# EAGLE board pro_mini_saber (EAGLE 6.4)

Size 100 x 80 mm. Coordinates in mm from the lower left corner, seen from the top.
Outline: 0,0 100,0 100,80 0,80 0,0
Copper layers (1*16): Top 0.035mm / dielectric 1.5mm / Bottom 0.035mm
Design rules "default": minimum track width 10mil, minimum drill 24mil, track to track 8mil, track to pad 8mil, pad to pad 8mil, via to via 8mil, smd to smd 8mil, copper to edge 40mil, drill to drill 8mil, minimum pad ring 10mil, minimum via ring 8mil, stop-mask expansion 4mil, vias tented up to drill 0mil, thermal gap 10mil
Net classes: 1 power: width 0.508 mm

## Footprints (pad centres in the part's own frame; a part is rotated, then mirrored left to right if it is on the bottom)
1X02 = drill 1.016 pad 1.88: 1 0,0; 2 2.54,0
SML0805 = smd 1.2 x 1.2: A 1.05,0; C -1.05,0
1X04 = drill 1.016 pad 1.88 square: 1 0,0 | drill 1.016 pad 1.88: 2 2.54,0; 3 5.08,0; 4 7.62,0
1X02' = drill 1.016 long: 1 -1.27,0; 2 1.27,0
C0805 = smd 1.3 x 1.5: 1 -0.85,0; 2 0.85,0
C1206K = smd 1.5 x 2: 1 -1.5,0; 2 1.5,0
C025-025X050 = drill 0.813 octagon: 1 -1.27,0; 2 1.27,0
TQFP32-08 = smd 1.27 x 0.559: 1 -4.293,2.8; 2 -4.293,2; 3 -4.293,1.2; 4 -4.293,0.4; 5 -4.293,-0.4; 6 -4.293,-1.2; 7 -4.293,-2; 8 -4.293,-2.8; 17 4.293,-2.8; 18 4.293,-2; 19 4.293,-1.2; 20 4.293,-0.4; 21 4.293,0.4; 22 4.293,1.2; 23 4.293,2; 24 4.293,2.8 | smd 0.559 x 1.27: 9 -2.8,-4.293; 10 -2,-4.293; 11 -1.2,-4.293; 12 -0.4,-4.293; 13 0.4,-4.293; 14 1.2,-4.293; 15 2,-4.293; 16 2.8,-4.293; 25 2.8,4.293; 26 2,4.293; 27 1.2,4.293; 28 0.4,4.293; 29 -0.4,4.293; 30 -1.2,4.293; 31 -2,4.293; 32 -2.8,4.293
DIL08 = drill 0.813 long: 1 -3.81,-3.81; 2 -1.27,-3.81; 3 1.27,-3.81; 4 3.81,-3.81; 5 3.81,3.81; 6 1.27,3.81; 7 -1.27,3.81; 8 -3.81,3.81
1X03 = drill 1.016 pad 1.88: 1 0,0; 2 2.54,0; 3 5.08,0
MMA8451 = drill 0.8: 3.3V -7.62,6.35; GND -7.62,3.81; INT1 -7.62,-8.89; INT2 -7.62,-6.35; SA0 -7.62,-3.81; SCL -7.62,1.27; SDA -7.62,-1.27; VCC_IN -7.62,8.89
1X11 = drill 1.016 pad 1.88: 1 0,0; 2 2.54,0; 3 5.08,0; 4 7.62,0; 5 10.16,0; 6 12.7,0; 7 15.24,0; 8 17.78,0; 9 20.32,0; 10 22.86,0; 11 25.4,0
MA03-2 = drill 1.016: 1 -2.54,-1.27 | drill 1.016 octagon: 2 -2.54,1.27; 3 0,-1.27; 4 0,1.27; 5 2.54,-1.27; 6 2.54,1.27
QS = drill 0.61 long: 1 -2.54,0; 2 2.54,0
R0805 = smd 1.3 x 1.5: 1 -0.95,0; 2 0.95,0
M0805 = smd 1.3 x 1.6: 1 -0.95,0; 2 0.95,0
TSSOP20 = smd 0.305 x 0.991: 1 -2.925,-2.918; 2 -2.275,-2.918; 3 -1.625,-2.918; 4 -0.975,-2.918; 5 -0.325,-2.918; 6 0.325,-2.918; 7 0.975,-2.918; 8 1.625,-2.918; 9 2.275,-2.918; 10 2.925,-2.918; 11 2.925,2.918; 12 2.275,2.918; 13 1.625,2.918; 14 0.975,2.918; 15 0.325,2.918; 16 -0.325,2.918; 17 -0.975,2.918; 18 -1.625,2.918; 19 -2.275,2.918; 20 -2.925,2.918
SOT23-5 = smd 0.55 x 1.2: 1 -0.95,-1.3; 2 0,-1.3; 3 0.95,-1.3; 4 0.95,1.3; 5 -0.95,1.3
USD-SOCKET-PP = smd 0.75 x 1.5: 1 3.2,16.8; 2 2.1,16.8; 3 1,16.8; 4 -0.1,16.8; 5 -1.2,16.8; 6 -2.3,16.8; 7 -3.4,16.8; 8 -4.5,16.8 | smd 1 x 1.3: CD1 -5.85,16.75 | smd 1.4 x 1: CD2 -6.425,4.5 | smd 1.5 x 1.35: GND1 -6.275,1.475; GND2 7.375,0.475
TPA0211 = smd 1.55 x 0.35: BYPASS -2.1,-1.15; GND 2.1,0.15; IN -2.1,0.8; SE 2.1,-0.5; SHUTDOWN -2.1,0.15; VDD -2.1,-0.5; VO+ 2.1,-1.15; VO- 2.1,0.8
ARDUINO_PRO_MINI = drill 1.016 pad 1.88: 1 -7.62,12.7; 2 -7.62,10.16; 3 -7.62,7.62; 4 -7.62,5.08; 5 -7.62,2.54; 6 -7.62,0; 7 -7.62,-2.54; 8 -7.62,-5.08; 9 -7.62,-7.62; 10 -7.62,-10.16; 11 -7.62,-12.7; 12 -7.62,-15.24; 13 7.62,-15.24; 14 7.62,-12.7; 15 7.62,-10.16; 16 7.62,-7.62; 17 7.62,-5.08; 18 7.62,-2.54; 19 7.62,0; 20 7.62,2.54; 21 7.62,5.08; 22 7.62,7.62; 23 7.62,10.16; 24 7.62,12.7; A4 4.763,1.429; A5 4.763,3.969; A6 4.763,-9.049; A7 4.763,-6.509; BLK -6.35,15.24; GND -3.81,15.24; GRN 6.35,15.24; RXI 1.27,15.24; TXO 3.81,15.24; VCC -1.27,15.24
PTH08080EUF = drill 1.2 octagon: 1 0,0; 2 0,-3.556; 3 0,-7.112; 4 12.192,-8.382; 5 12.192,1.27

## Placement (x,y rotation side)
3.3V_OUT  M02PTH  [1X02]  -21.59,64.77 0 top  (outside the outline)
3V3  [SML0805]  -36.83,82.55 0 top  (outside the outline)
5V_OUT  M02PTH  [1X02]  -30.48,64.77 0 top  (outside the outline)
ADC  [1X04]  -50.8,77.47 0 top  (outside the outline)
ADC1  [1X04]  -62.23,77.47 0 top  (outside the outline)
ATMEGA  [SML0805]  -31.75,82.55 0 top  (outside the outline)
BAT_IN  [1X02']  -48.26,71.12 0 top  (outside the outline)
BLUETOOTH  [1X04]  -39.37,77.47 0 top  (outside the outline)
C1  22p  [C0805]  -71.12,71.12 0 top  (outside the outline)
C2  22p  [C0805]  -16.51,78.74 0 top  (outside the outline)
C3  0.1u  [C0805]  -60.96,71.12 0 top  (outside the outline)
C4  22p  [C0805]  -21.59,78.74 0 top  (outside the outline)
C5  [C1206K]  -41.91,83.82 0 top  (outside the outline)
C6  0.1u  [C0805]  -66.04,71.12 0 top  (outside the outline)
C7  [C025-025X050]  -71.12,77.47 0 top  (outside the outline)
C8  [C1206K]  -46.99,83.82 0 top  (outside the outline)
C9  22p  [C0805]  -26.67,78.74 0 top  (outside the outline)
HP  [1X02']  -54.61,71.12 0 top  (outside the outline)
IC2  MEGA8-AI  [TQFP32-08]  -68.58,40.64 0 top  (outside the outline)
IC6  MCP4921  [DIL08]  -55.88,40.64 0 top  (outside the outline)
LED  SMALL_SERVO  [1X03]  -66.04,54.61 0 top  (outside the outline)
MMA8451  DEV  [MMA8451]  -59.69,11.43 0 top  (outside the outline)
MPU-9150  Accelerometer  [1X11]  -50.8,54.61 0 top  (outside the outline)
PROG  [MA03-2]  -19.05,55.88 0 top  (outside the outline)
Q1  [QS]  -48.26,63.5 0 top  (outside the outline)
R1  10k  [R0805]  -26.67,72.39 0 top  (outside the outline)
R2  100k  [R0805]  -58.42,64.77 0 top  (outside the outline)
R3  100k  [R0805]  -64.77,64.77 0 top  (outside the outline)
R4  350  [R0805]  -21.59,72.39 0 top  (outside the outline)
R5  10k  [R0805]  -31.75,72.39 0 top  (outside the outline)
R6  100k  [R0805]  -71.12,64.77 0 top  (outside the outline)
R7  1k  [M0805]  -36.83,72.39 0 top  (outside the outline)
R8  1k  [M0805]  -41.91,72.39 0 top  (outside the outline)
R9  1.5k  [R0805]  -16.51,72.39 0 top  (outside the outline)
R11  [R0805]  -16.51,82.55 0 top  (outside the outline)
R12  [R0805]  -22.86,82.55 0 top  (outside the outline)
U1  [TSSOP20]  -36.83,64.77 0 top  (outside the outline)
U2  [SOT23-5]  -66.04,77.47 0 top  (outside the outline)
U3  USD-SOCKETUSD  [USD-SOCKET-PP]  -45.72,6.35 0 top  (outside the outline)
U$1  TPA0211  [TPA0211]  -26.67,38.1 0 top  (outside the outline)
U$2  ARDUINO_PRO_MINI  [ARDUINO_PRO_MINI]  -27.94,17.78 0 top  (outside the outline)
U$4  PTH08080  [PTH08080EUF]  -48.26,44.45 0 top  (outside the outline)

## Library data of the parts
3.3V_OUT 5V_OUT ADC ADC1 BLUETOOTH MPU-9150 U3 = SparkFun-Connectors
3V3 ATMEGA = led
BAT_IN HP = pinhead
C1-C4 C6 C9 IC6 U1 = adafruit
C5 C7 C8 R1-R9 R11 R12 = rcl
IC2 = atmel
LED = SparkFun-Electromechanical
MMA8451 = MMA8451_miniboard
PROG = con-lstb
Q1 = special
U2 = SparkFun-PowerIC; PROD_ID: VREG-00822
U$1 = TPA0211
U$2 = SparkFun-Boards
U$4 = PTH08080

## Nets
+3V3: 3.3V_OUT.1 BLUETOOTH.4 C1.2 MPU-9150.2 R7.2 U1.2 U2.5 U3.4
+5V: 5V_OUT.1 C2.2 C5.1 IC2.4 IC2.6 IC6.1 LED.2 MMA8451.VCC_IN PROG.2 R1.2 R5.1 R6.1 U1.19 U2.1 U2.3 U$1.VDD U$2.21 U$4.3
+12V: BAT_IN.1 C8.1 R2.2 U$2.24 U$4.1
ADC0: ADC.1 IC2.23
ADC1: ADC.2 IC2.24
ADC2: ADC.3 IC2.25
ADC3: ADC.4 IC2.26
AVCC: IC2.18
BATTLEVEL: IC2.22 R2.1 R3.2 U$2.A6
DAC_CS: IC2.2 IC6.2 U$2.7
DAC_DI: IC2.10 IC6.4 U$2.9
DAC_LATCH: IC2.11 IC6.5 U$2.10
DAC_SCK: IC2.9 IC6.3 U$2.8
GND: 3.3V_OUT.2 3V3.C 5V_OUT.2 ATMEGA.C BAT_IN.2 BLUETOOTH.3 C1.1 C2.1 C3.2 C4.2 C5.2 C6.2 C7.2 C8.2 C9.2 IC2.3 IC2.5 IC2.21 IC6.7 LED.3 MMA8451.GND MPU-9150.1 PROG.6 R3.1 R4.1 R11.1 R12.1 U1.11 U2.2 U3.6 U3.CD1 U3.CD2 U3.GND1 U3.GND2 U$1.GND U$2.4 U$2.23 U$4.2 U$4.5
INT0: IC2.32 MPU-9150.11 U$2.5
INT1: IC2.1 MMA8451.INT1 U$2.6
MISO: IC2.16 PROG.1 U1.20 U$2.15
MMC_CS: IC2.14 R5.2 U1.16 U$2.13
MOSI: IC2.15 U1.18 U$2.14
N$1: C9.1 IC2.8 Q1.2
N$2: C4.1 IC2.7 Q1.1
N$3: R9.1 U$1.IN
N$4: IC6.8 R9.2
N$5: R4.2 U$4.4
N$6: U1.4 U3.5
N$7: U1.1 U3.7
N$8: C3.1 IC2.20
N$9: U1.5 U3.2
N$10: 3V3.A R7.1
N$11: U1.3 U3.3
N$12: ATMEGA.A R8.1
N$13: ADC1.1 U$2.20
N$14: ADC1.2 U$2.19
N$15: ADC1.3 U$2.18
N$16: ADC1.4 U$2.17
N$19: C6.1 IC6.6 R6.2
N$20: IC2.13 LED.1
N$22: HP.1 U$1.VO-
N$23: C7.1 U$1.BYPASS
N$32: R11.2 U$1.SHUTDOWN
N$33: R12.2 U$1.SE
RST: IC2.29 PROG.5 R1.1
RXI: BLUETOOTH.2 IC2.30 U$2.2
SCK: IC2.17 PROG.3 U1.17 U$2.16
SCL: IC2.28 MMA8451.SCL MPU-9150.4 U$2.A5
SDA: IC2.27 MMA8451.SDA MPU-9150.3 U$2.A4
TXO: BLUETOOTH.1 IC2.31 U$2.1
VCC2: R8.2
VO+: HP.2 U$1.VO+

## Tracks (layer width: path | path; a pad name or v marks a point on that pad's centre or on a via)
+3V3  (7 unrouted)
+5V  (17 unrouted)
+12V  (4 unrouted)
ADC0  (1 unrouted)
ADC1  (1 unrouted)
ADC2  (1 unrouted)
ADC3  (1 unrouted)
BATTLEVEL  (3 unrouted)
DAC_CS  (2 unrouted)
DAC_DI  (2 unrouted)
DAC_LATCH  (2 unrouted)
DAC_SCK  (2 unrouted)
GND  (38 unrouted)
INT0  (2 unrouted)
INT1  (2 unrouted)
MISO  (3 unrouted)
MMC_CS  (3 unrouted)
MOSI  (2 unrouted)
N$1  (2 unrouted)
N$2  (2 unrouted)
N$3  (1 unrouted)
N$4  (1 unrouted)
N$5  (1 unrouted)
N$6  (1 unrouted)
N$7  (1 unrouted)
N$8  (1 unrouted)
N$9  (1 unrouted)
N$10  (1 unrouted)
N$11  (1 unrouted)
N$12  (1 unrouted)
N$13  (1 unrouted)
N$14  (1 unrouted)
N$15  (1 unrouted)
N$16  (1 unrouted)
N$19  (2 unrouted)
N$20  (1 unrouted)
N$22  (1 unrouted)
N$23  (1 unrouted)
N$32  (1 unrouted)
N$33  (1 unrouted)
RST  (2 unrouted)
RXI  (2 unrouted)
SCK  (3 unrouted)
SCL  (3 unrouted)
SDA  (3 unrouted)
TXO  (2 unrouted)
VO+  (1 unrouted)